# Altium PCB TURN PCB.PcbDoc (part 1 of 2)
Units mm, origin at the board's own origin, x right, y up, seen from the top; angles counter-clockwise.
Board outline 52.97 x 55 mm, 4 copper layers (Top Layer, Signal Layer 1, Signal Layer 2, Bottom Layer), stack 1.593 mm thick; 91 components, 69 nets, 300 pads, 173 vias.
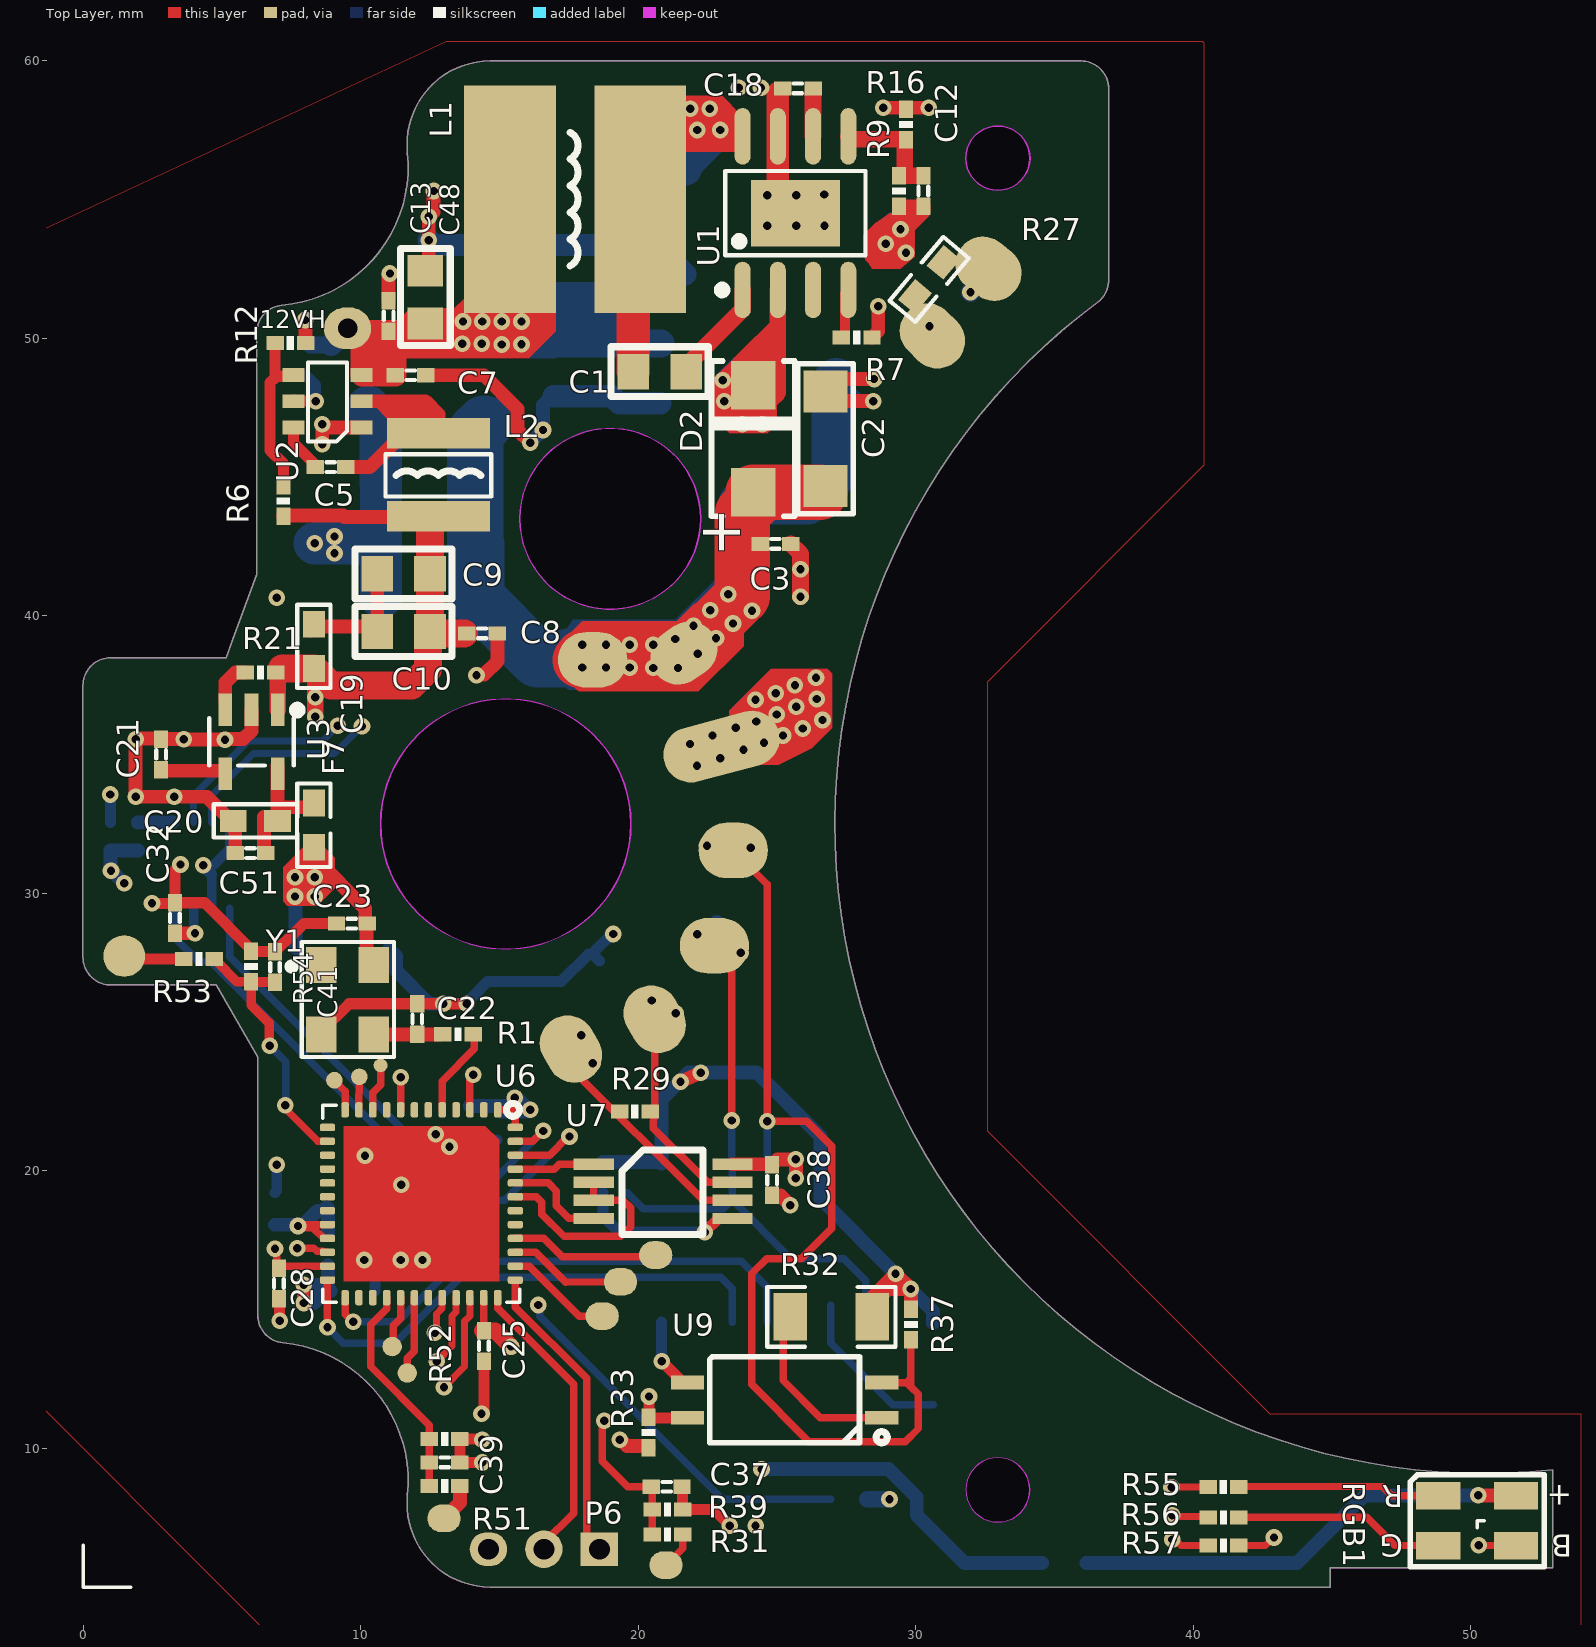
[diagram p0: Top Layer view]
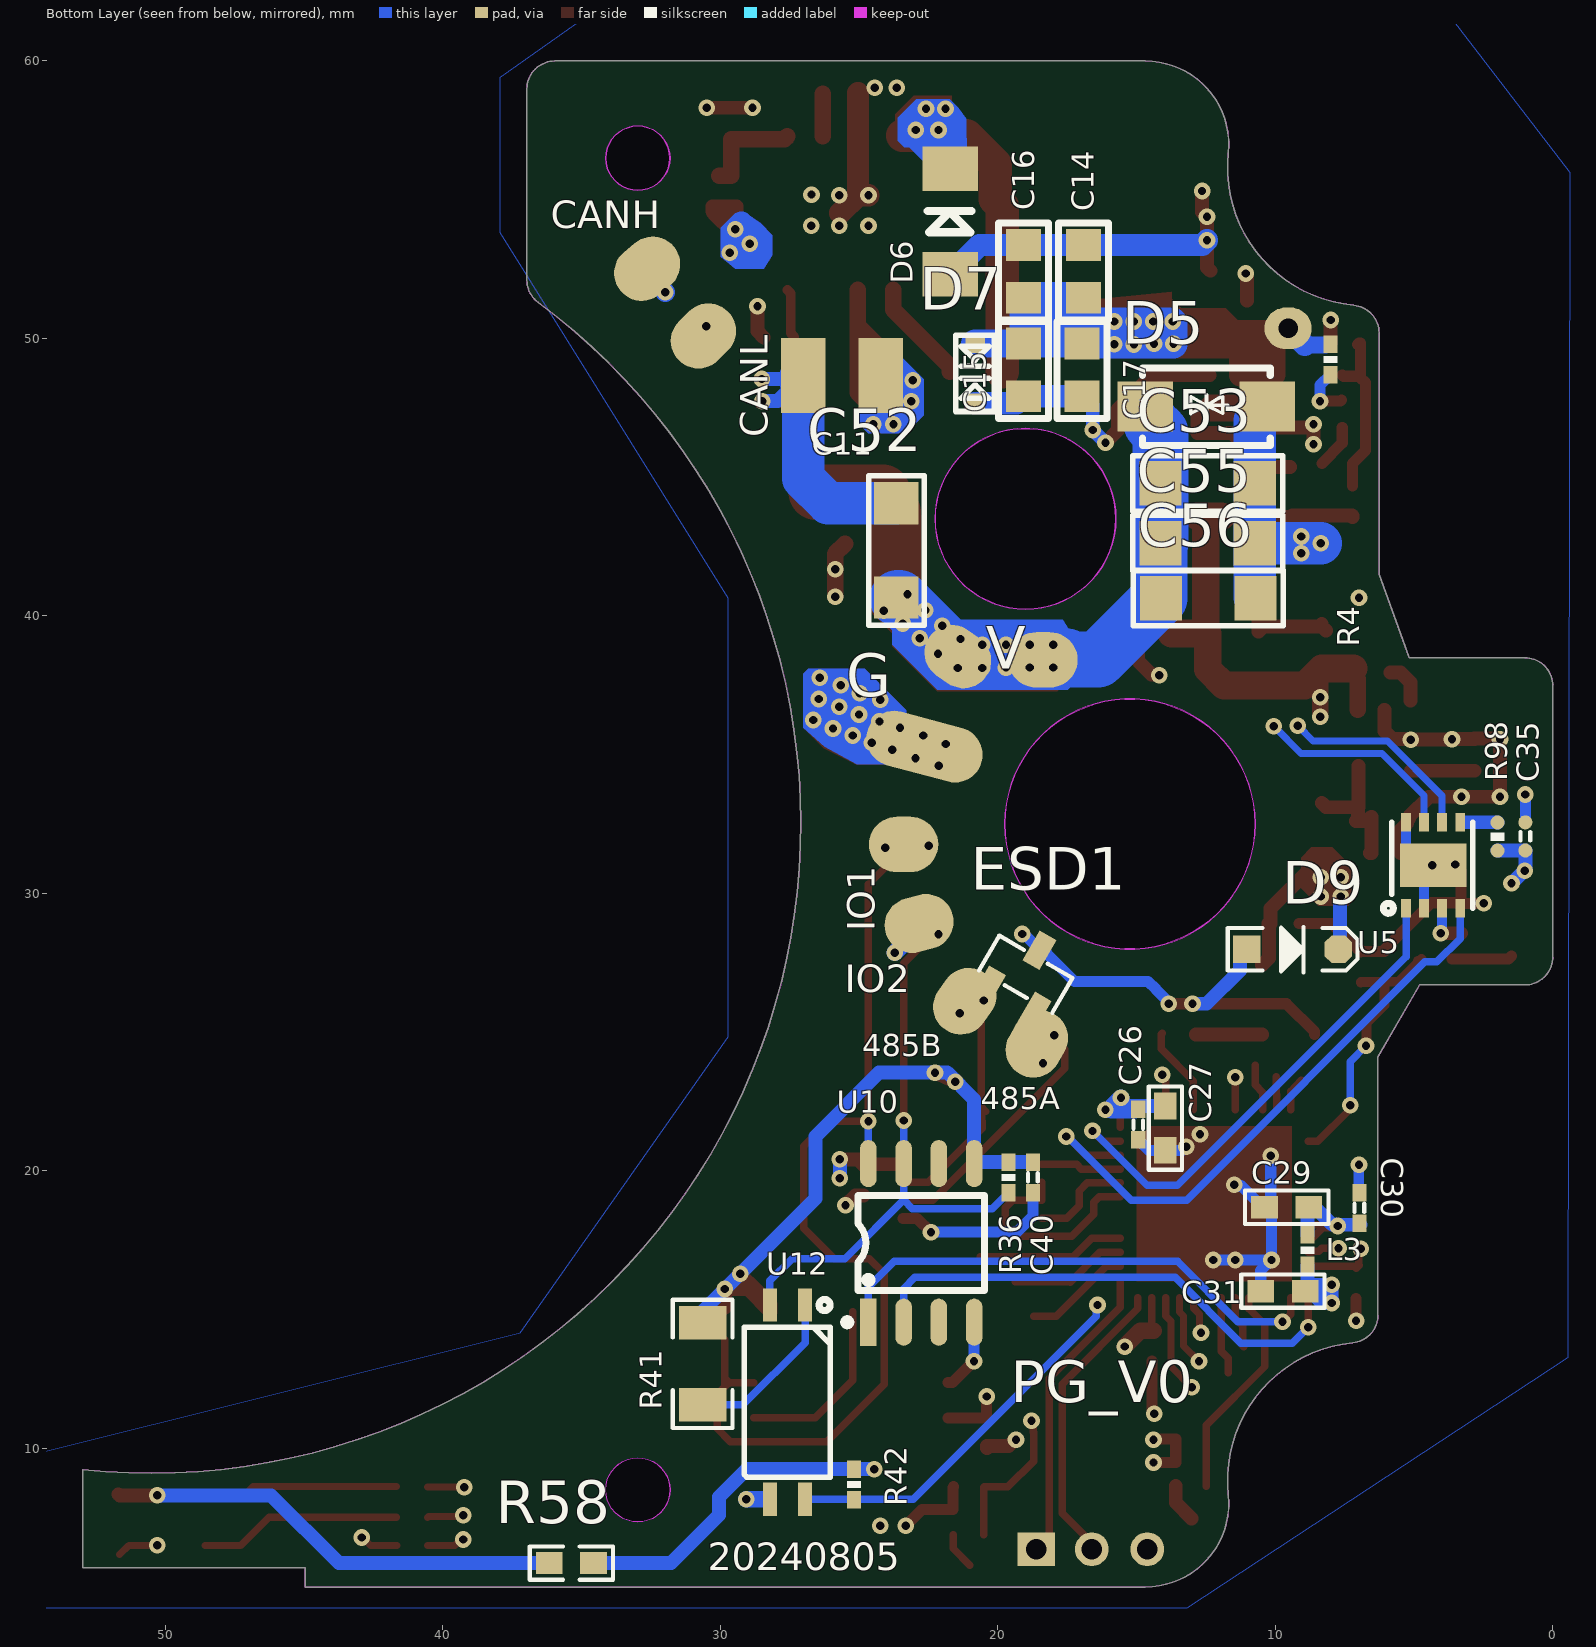
[diagram p1: Bottom Layer view, seen from below]
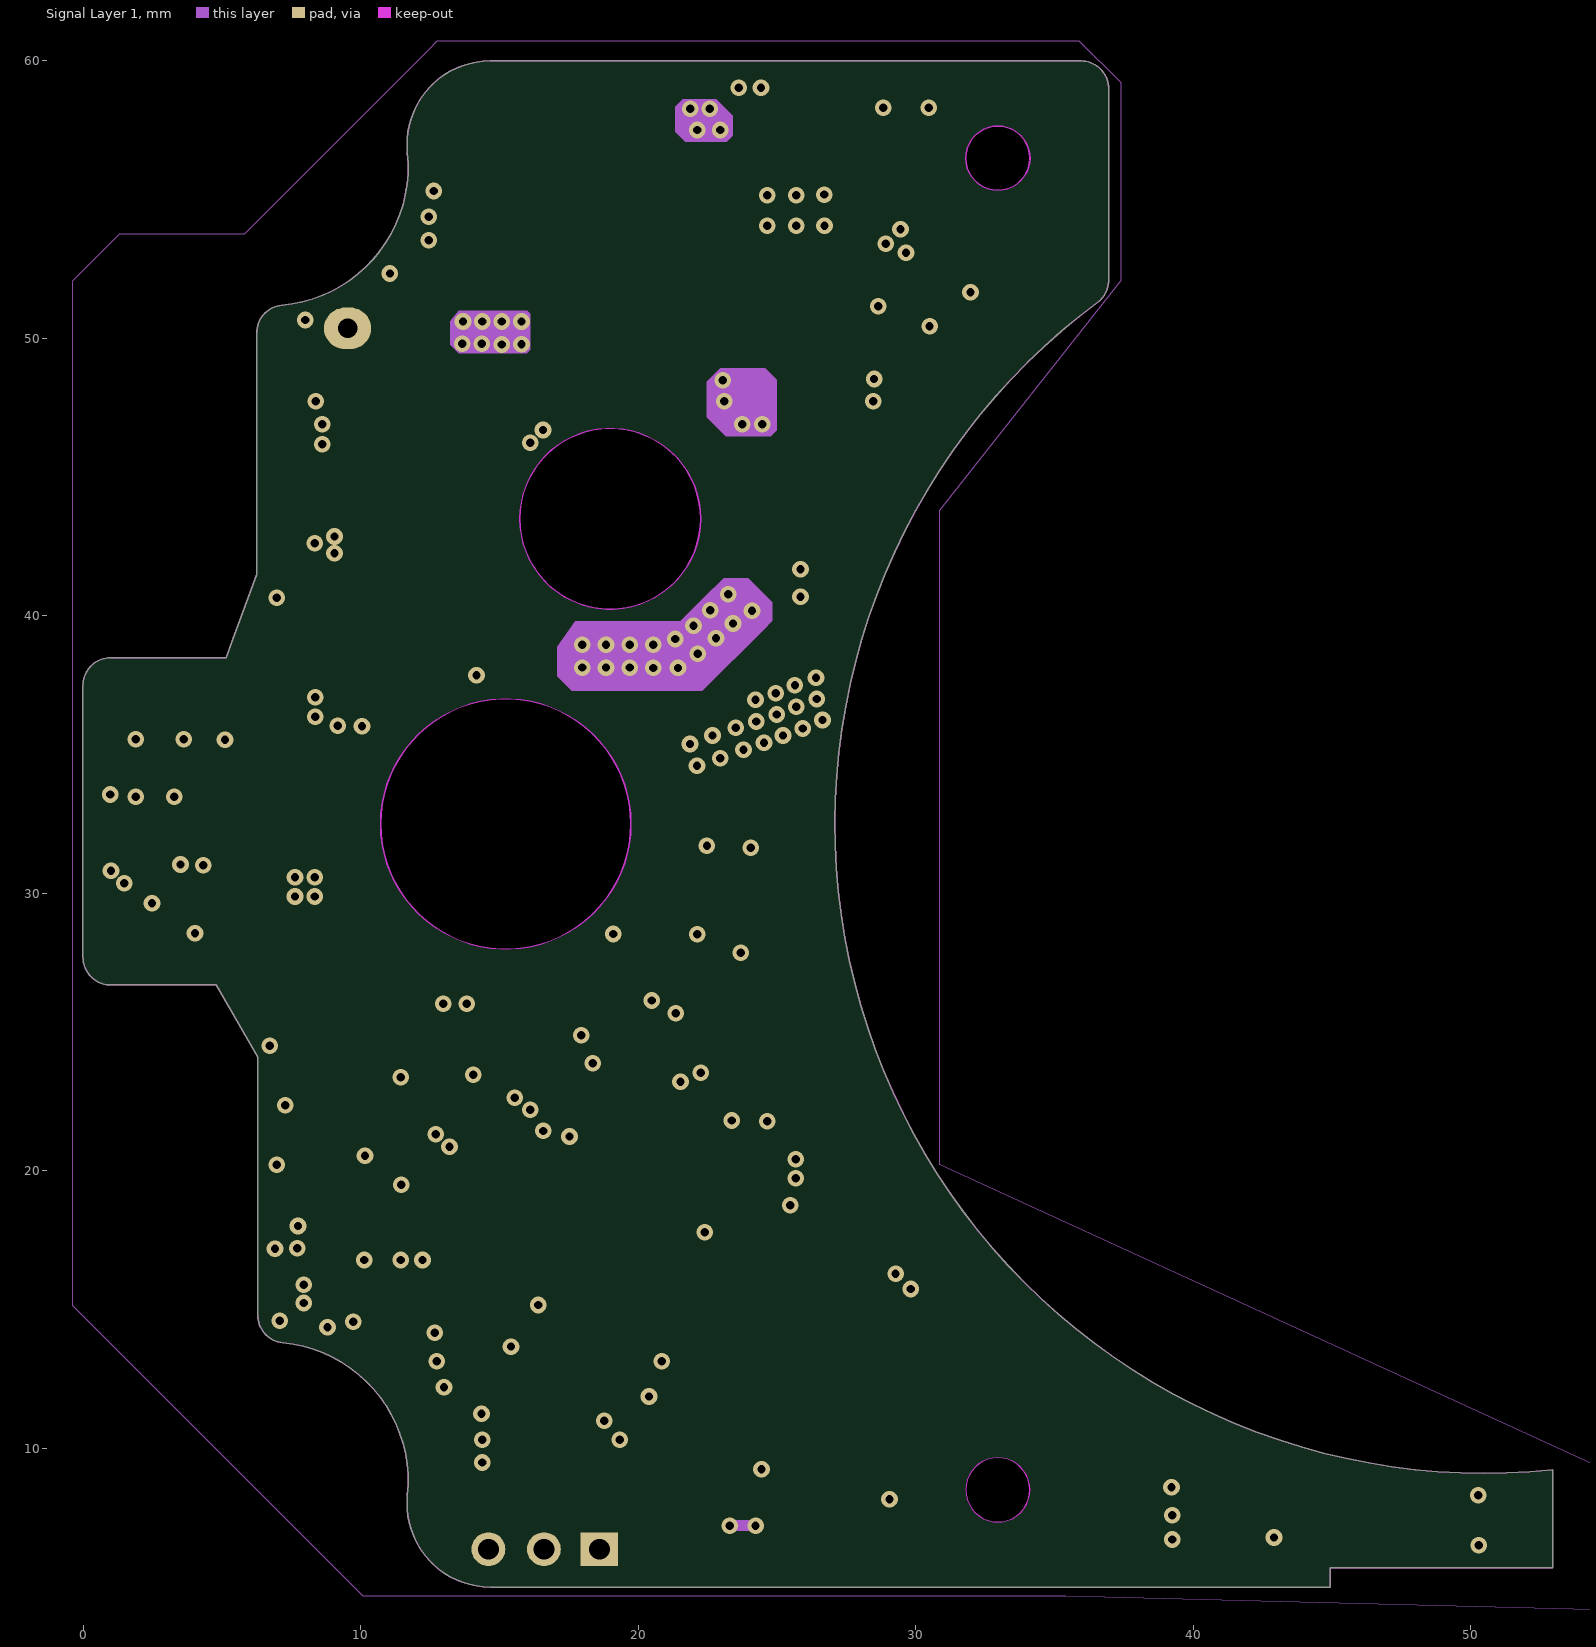
[diagram p2: Signal Layer 1]
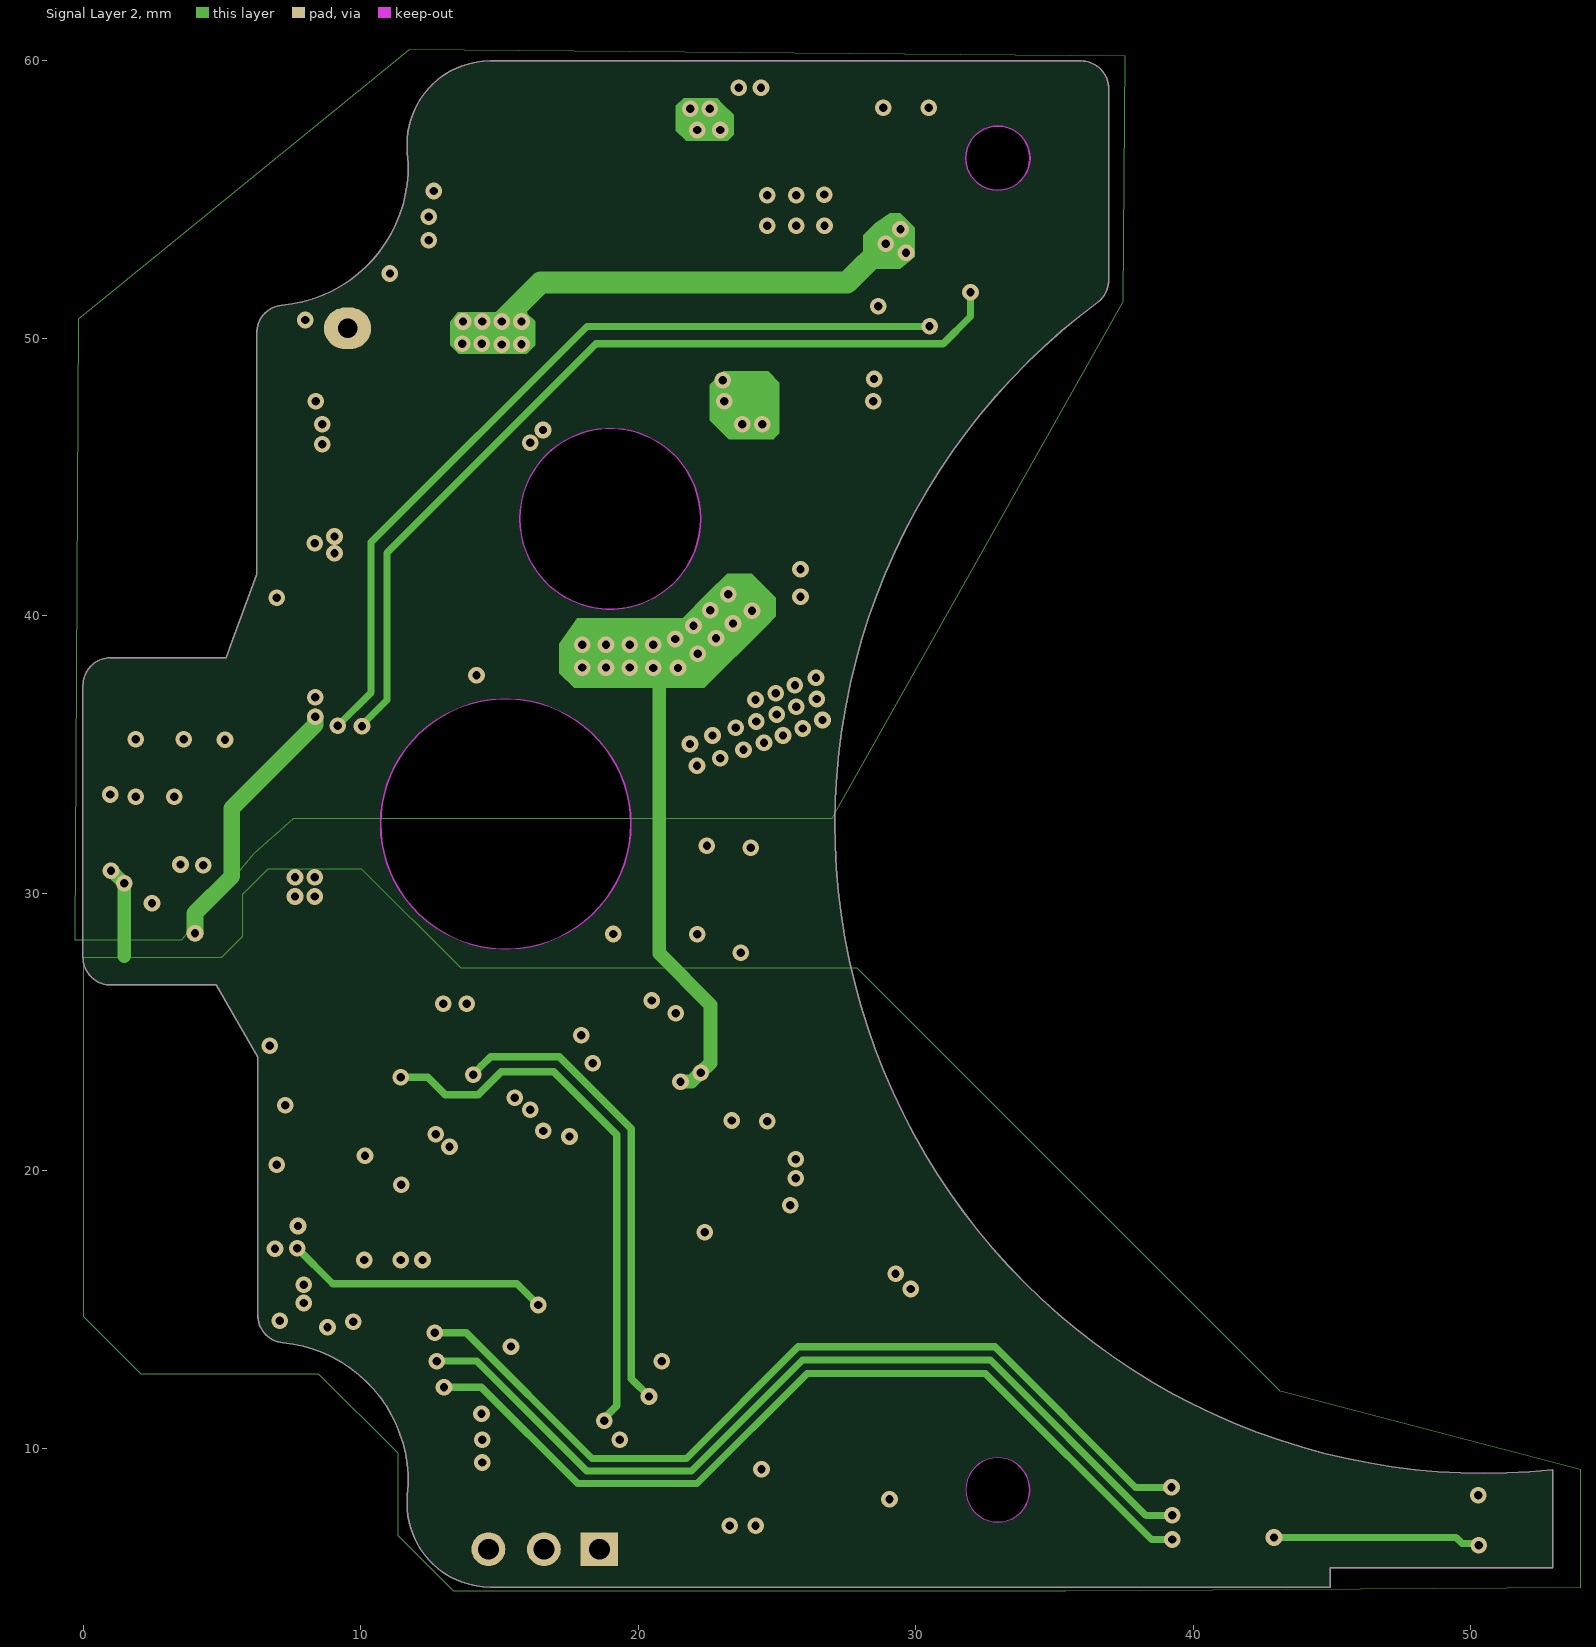
[diagram p3: Signal Layer 2]

## Layer stack, top to bottom
Top Solder: solder mask 0.0102, Solder Resist, Dk 3.5
Top Layer: signal copper 0.0356
Dielectric 1: core 0.45, FR-4, Dk 30
Signal Layer 1: signal copper 0.036
Dielectric 3: prepreg 0.55, Dk 50
Signal Layer 2: signal copper 0.036
Dielectric 2: core 0.45, Dk 30
Bottom Layer: signal copper 0.0356
Bottom Solder: solder mask 0.0102, Solder Resist, Dk 3.5

## Board outline
0.993,26.7 4.793,26.7 6.293,24.102 6.293,14.797 ccw(c7.293,14.797) 7.197,13.802 cw(c6.716,8.826) 11.688,8.309 ccw(c14.672,8) 14.672,5 44.954,5 44.954,5.7 52.964,5.7 52.964,9.231 cw(c50.494,32.5) 47.992,9.234 cw(c50.494,32.5) 36.559,51.299 ccw(c35.963,52.103) 36.963,52.103 36.963,59 ccw(c35.963,59) 35.963,60 14.672,60 ccw(c14.672,57) 11.688,56.691 cw(c6.714,56.175) 7.163,51.195 ccw(c7.252,50.199) 6.252,50.199 6.252,41.494 5.399,39.149 5.16,38.494 0.993,38.494 ccw(c0.993,37.494) -0.007,37.494 -0.007,27.7 ccw(c0.993,27.7)
cut-out: 10.717,32.5 cw(c15.23,32.5) 19.744,32.5 cw(c15.23,32.5)
cut-out: 32.97,55.343 cw(c32.97,56.5) 31.813,56.5 cw(c32.97,56.5) 32.97,57.657 cw(c32.97,56.5) 34.127,56.5 cw(c32.97,56.5)
cut-out: 31.813,8.5 ccw(c32.97,8.5) 32.97,7.343 ccw(c32.97,8.5) 34.127,8.5 ccw(c32.97,8.5) 32.97,9.657 ccw(c32.97,8.5)
cut-out: 19,40.243 cw(c19,43.5) 15.743,43.5 cw(c19,43.5) 19,46.757 cw(c19,43.5) 22.256,43.5 cw(c19,43.5)

## Design rules (kind name [scope] priority, off if disabled: settings)
Clearance POLY [INPOLY] p1: gap=0.3 ignorepadtopadclearanceinfootprint=FALSE
Clearance [All] p2: gap=0.2 ignorepadtopadclearanceinfootprint=FALSE except(0.3: Arc-Fill Arc-Poly Arc-Region Track-Fill Track-Poly Track-Region THPad-Fill THPad-Poly THPad-Region)
PolygonConnect [All] p1: connectstyle=Direct reliefconductorwidth=0.254 reliefentries=4 polygonreliefangle="90 Angle" airgapwidth=0.254
RoutingVias [All] p1: holewidth=0.711 width=0.6 viastyle="Through Hole" minholewidth=0.3 minwidth=0.6 maxholewidth=0.711 maxwidth=1.27
SilkToSilkClearance [All] p1 off: silktosilkclearance=0.254
SilkToSolderMaskClearance [IsPad] p1 off: minsilkscreentomaskgap=0.254 clearancetoexposedcopper=TRUE
SolderMaskExpansion [All] p1: expansion=0.102 istentingtop=FALSE
Width [All] p1: maxlimit=5 minlimit=0.254 preferedwidth=0.254
28 further rules are at their usual default settings.

## Components (designator, comment, footprint, x,y, rotation, side; value= is the part's Value field where it differs from the comment)
12VH "Test point" PAD07 9.516,50.406 r90 top
C1 "100nF ±10% 100V 0805" 0805C 21.73,48.801 r180 top value=100nF
C2 "10uF ±10% 50V" 1206C 26.756,44.683 r90 top value=100pF
C3 "100nF ±10% 50V" 0402C 24.952,42.598 r0 top value=100pF
C5 "100nF ±5% 50V 0402" 0402C 8.918,45.363 r0 top value=100pF
C7 "100nF ±10% 50V" 0402C 11.806,48.674 r0 top value=100pF
C8 "100nF ±10% 50V" 0402C 14.381,39.368 r0 top value=100pF
C9 "47uF/10V" 0805C 12.498,41.517 r180 top value=100pF
C10 "47uF/10V" 0805C 12.498,39.438 r180 top value=100pF
C11 "10uF(106) ±10% 50V" C1210 25.606,48.663 r0 bottom
C12 "330pF ±5% 50V 0402" 0402C 30.281,55.313 r90 top value=330pF
C13 "100nF ±10% 50V" 0402C 11.006,50.813 r90 top value=100pF
C14 "10uF ±10% 50V 0805" 0805C 16.909,51.468 r90 bottom value=100pF
C15 "22uF ±20% 25V 0805" 0805C 19.068,49.817 r270 bottom value=100pF
C16 "22uF ±20% 25V 0805" 0805C 19.068,51.468 r90 bottom value=100pF
C17 "22uF ±20% 25V 0805" 0805C 16.956,49.817 r270 bottom value=100pF
C18 "8.2nF ±10% 50V" 0402C 25.756,59.013 r180 top value=8.2nF
C19 "1uF ±10% 10V 0603" 0603C 8.318,38.103 r90 top value=100pF
C20 "1uF ±10% 10V 0603" 0603C 7.005,32.613 r180 top value=100pF
C21 "NC/22nF/25V" 0402C 2.806,35.007 r90 top value=100pF
C22 "15pF/6.3V" 0402C 12.041,25.471 r270 top
C23 "100nF ±10% 50V" 0402C 9.681,28.909 r0 top value=0.1uF/6.3V
C25 "100nF ±10% 50V" 0402C 14.441,13.688 r90 top value=0.1uF/10V
C26 "100nF ±10% 50V" 0402C 14.931,21.663 r90 bottom value=0.1uF/10V
C27 "10uF ±10% 10V 0603" 0603C 13.956,20.738 r90 bottom value=10uF/10V
C28 "100nF ±10% 50V" 0402C 7.056,15.938 r90 top value=0.1uF/10V
C29 "1uF ±10% 6.3V" 0603C 10.381,18.688 r180 bottom value="1uF ±10% 10V 0603"
C30 "100nF ±10% 50V" 0402C 6.961,18.663 r270 bottom value=0.1uF/10V
C31 "10uF ±10% 10V 0603" 0603C 10.518,15.663 r180 bottom value=10uF/10V
C32 "100nF ±10% 50V" 0402C 3.306,29.113 r90 top value=100pF
C35 "100nF(104) ±10% 50V 0402" C0402-S 0.981,32.56 r270 bottom
C37 "10nF/25V" 0402C 21.033,8.614 r180 top
C38 "100nF ±10% 50V" 0402C 24.831,19.663 r90 top value=0.1uF/10V
C39 "10nF/25V" 0402C 13.031,9.488 r180 top
C40 "100nF ±10% 50V" 0402C 18.731,19.763 r270 bottom value=100pF
C41 "10nF/25V" 0402C 6.914,27.341 r270 top
C48 "22uF ±20% 25V 0805" 0805C 12.331,50.538 r90 top value=100pF
C51 "100nF ±10% 50V" 0402C 6.03,31.454 r180 top value=100pF
C52 "10uF ±10% 50V" 1206C 23.652,40.659 r90 bottom value=100pF
C53 "10uF ±10% 50V" 1206C 14.13,44.774 r180 bottom value=100pF
C55 "10uF ±10% 50V" 1206C 14.13,42.622 r180 bottom value=100pF
C56 "10uF ±10% 50V" 1206C 14.109,40.64 r180 bottom value=100pF
D2 "SS54F" SMA 24.148,46.388 r90 top
D5 "SMAJ40CA" SMA_L4.4-W2.8-LS5.1-BI 12.471,47.6 r0 bottom
D6 "SS26FL" SS26FL 21.706,56.113 r270 bottom value=700mV
D7 "ESDBW18VD3" SOD-323A 20.813,49.817 r270 bottom
D9 "LBZT52C5V6T1G" SOD-123 9.37,27.986 r180 bottom
ESD1 "LBT23C24L02" SOT-23-3_L2.9-W1.3-P1.90-LS2.4-BR 18.985,27.086 r300 bottom
F7 "FC0603-1150FS" 0603R 8.316,33.256 r270 top
L1 "SRN8040TA-150M" VLP8040 20.084,55.024 r180 top value=15uH
L2 "3.3uH ±20% 2.4A" L4030 12.806,46.588 r270 top value=3.3uH
L3 "600 Ohms@100MHz" 0402R 8.831,17.138 r90 bottom
P6 "A2001WV-3P" PH2.0_1X3S 18.606,6.363 r180 top
R1 "0R 1%" 0402R 13.507,24.924 r180 top
R4 "100kΩ ±1% 0402" 0402R 8.006,49.238 r270 bottom value="10K 5%"
R6 "100kΩ ±1% 0402" 0402R 7.213,44.137 r270 top value="10K 5%"
R7 "20kΩ ±1% 0402" 0402R 27.881,50.038 r0 top value=20k
R9 "150kΩ ±1% 0402" 0402R 29.4,55.313 r90 top value=150k
R12 "13.7K 1%" 0402R 7.466,49.838 r180 top value="31.6K 1%"
R16 "10kΩ ±1% 0402" 0402R 29.656,57.713 r90 top value=10k
R21 "100kΩ ±1% 0402" 0402R 6.391,37.964 r180 top value="10K 5%"
R27 "120R 1% 0603" 0603R 29.977,51.513 r50 top value=1K
R29 "120Ω ±1% 0402" 0402R 19.881,22.138 r0 top value=1K
R31 "51K 1‰" 0402R 21.056,6.891 r180 top
R32 "6.2k 5% 1206" R1206 26.968,14.738 r0 top value=1K
R33 "4k7 1%" 0402R 20.381,10.563 r270 top value=1K
R36 "10kΩ ±1% 0402" 0402R 19.612,19.763 r270 bottom value="30K 5%"
R37 "10kΩ ±1% 0402" 0402R 29.831,14.463 r270 top value="30K 5%"
R39 "10K 1‰" 0402R 21.056,7.788 r0 top
R41 "6.2k 5% 1206" R1206 30.631,13.042 r90 bottom value=1K
R42 "4k7 1%" 0402R 25.177,8.7 r90 bottom value=1K
R51 "51K 1‰" 0402R 13.031,8.638 r180 top
R52 "10K 1‰" 0402R 13.031,10.338 r0 top
R53 "51K 1‰" 0402R 4.173,27.638 r0 top
R54 "10K 1‰" 0402R 6.056,27.363 r90 top
R55 "1k5 5%" 0402R 41.092,8.608 r180 top value=1K
R56 "1k5 5%" 0402R 41.096,7.506 r180 top value=1K
R57 "1k5 5%" 0402R 41.102,6.5 r180 top value=1K
R58 "0R 5%" 0603R 36.162,5.863 r180 bottom value=1K
R98 "0Ω" R0402-S 1.983,32.554 r270 bottom
RGB1 "S4-3528RGBTA-A" LED_3528 50.24,7.389 r180 top
U1 "LMR14020SDDAR" LM4020 25.672,54.516 r0 top value=N/A
U2 "LMR51420YDDC" TSOT23-6 10.031,46.788 r90 top
U3 "ME6215C33M5G" SOT-23-5_L3.0-W1.7-P0.95-LS2.8-BL 6.067,35.463 r180 top
U5 "TPT1256-DF6R" DFN8 5.281,29.463 r90 bottom
U6 "STM32G431CBU6" UFQFPN48 12.191,18.813 r180 top
U7 "SIT3485EUA" VSSOP8 18.401,20.238 r0 top
U9 "PS2801-1" SSOP4 28.781,11.098 r90 top
U10 "ULN2001D" SOIC8 24.657,14.543 r180 bottom
U12 "PS2801-1" SSOP4 26.936,15.163 r0 bottom
Y1 "8M 3.3V" XTAL_3225 8.577,27.413 r270 top

## Footprints (in the part's own frame and the unit in brackets; to place one, negate y for a bottom-side part, rotate by r counter-clockwise, add the part's x,y. Pads: shape width x height; smd on the part's side, far side on the other; paste and mask are expansions set on the pad)
0402C [mm]
  rect 0.63x0.508 smd: 1(-0.55,0) 2(0.55,0)
  silkscreen extent -0.15,-0.18 0.15,0.18, body extent -0.78,-0.25 0.73,0.26, height 0.25
0402R [mm]
  rect 0.63x0.508 smd: 1(-0.55,0) 2(0.55,0)
  silkscreen extent -0.13,-0.25 0.13,0.25, body extent -0.78,-0.25 0.73,0.26, height 0.25
0603C [mm]
  rect 0.96x0.8 smd: 1(0,0) 2(1.6,0)
  silkscreen extent -0.7,-0.6 2.3,0.6, body extent -0.25,-0.38 1.78,0.38, height 1
0603R [mm]
  rect 0.96x0.8 smd: 1(0,0) 2(1.6,0)
  silkscreen extent -0.7,-0.6 2.3,0.6, body extent 0,-0.41 1.6,0.41, height 0.45
0805C [mm]
  rect 1.14x1.27 smd: 1(0,0) 2(1.9,0)
  silkscreen extent -0.8,-0.9 2.7,0.9, body extent -0.25,-0.64 2.16,0.64, height 1.2
1206C [mm]
  rect 1.52x1.6 smd: 1(0,0) 2(3.4,0)
  silkscreen extent -1,-1 4.4,1, body extent 0,-0.83 3.81,0.83, height 1.2
C0402-S [mil]
  round 20 smd: 1(0,0) 2(40,0)
  silkscreen extent 14,-7 26,7, body extent 0,-10 40,10, height 5
C1210 [mm]
  rect 1.6x2.7 smd: 1(-1.4,0) 2(1.4,0)
  body extent -1.8,-1.23 1.4,1.27, height 2
DFN8 [mm]
  rect 0.65x0.35 smd: 1(0,0) 2(0,-0.65) 3(0,-1.3) 4(0,-1.95) 5(3.1,-1.95) 6(3.1,-1.3) 7(3.1,-0.65) 8(3.1,0)
  rect 1.55x2.4 smd: 9(1.55,-0.975)
  silkscreen extent -0.18,-2.41 3.1,0.81, body extent 0,-2.45 3.15,0.55, height 0.8
L4030 [mm]
  rect 1.1x3.7 smd: 1(0,0) 2(3,0)
  silkscreen extent 0.76,-1.91 2.29,1.91, body extent 0,-1.91 3,1.91, height 3
LED_3528 [mm]
  rect 1.6x1 smd: 1(1.4,-0.9) 2(-1.4,-0.9) 3(1.4,0.9) 4(-1.4,0.9)
  silkscreen extent -2.41,-1.65 2.41,1.65, body extent -1.75,-1.19 1.75,1.19, height 1.9
LM4020 [mm]
  oval 0.574x2.038 smd: 1(-1.905,-2.769) 2(-0.635,-2.769) 3(0.635,-2.769) 4(1.905,-2.769) 5(1.905,2.769) 6(0.635,2.769) 7(-0.635,2.769) 8(-1.905,2.769)
  rect 3.2x2.4 smd: 9(0,0)
  silkscreen extent -2.79,-2.92 2.53,1.52, body extent -2.58,-1.65 2.63,1.63, height 1.5
PAD07 [mm]
  oval 1.5x1.7 hole 0.7: 1(-0.043,-0.014)
PH2.0_1X3S [mm]
  rect 1.35x1.219 hole 0.75: 1(0,0)
  round 1.35 / inner round 1.219 / far side round 1.219 hole 0.75: 2(2,0)
  oval 1.35x1.219 / inner round 1.219 / far side round 1.219 hole 0.75: 3(4,0)
R0402-S [mil]
  round 20 smd: 1(0,0) 2(40,0)
  silkscreen extent 14,-10 26,10, body extent 0,-10 40,10, height 5
R1206 [mm]
  rect 1.208x1.701 smd: 1(-1.479,0) 2(1.479,0)
  silkscreen extent -2.31,-1.08 2.31,1.08, body extent -1.53,-0.85 1.6,0.85, height 0.9
SMA [mm]
  rect 1.75x1.6 smd: 1(-1.925,0) 2(1.925,0)
  silkscreen extent -2.8,-1.5 2.8,1.5, body extent -2.6,-1.32 2.6,1.33, height 2.15
SMA_L4.4-W2.8-LS5.1-BI [mm]
  rect 2x1.8 smd: 1(-2.198,0.06) 2(2.202,0.06)
  silkscreen extent -2.3,-1.34 2.3,1.46
SOD-123 [mm] "2.7x1.6X1.1mm（长宽高，不包括引脚）"
  oct 1x1 smd: 1(1.65,0)
  rect 1x1 smd: 2(-1.65,0)
  silkscreen extent -2.34,-0.84 2.34,0.81, body extent -1.85,-0.8 1.85,0.8, height 1.22
SOD-323A [mm]
  rect 0.7x0.7 smd: 1(0,0) 2(2.15,0)
  silkscreen extent -0.3,-0.7 2.45,0.7
SOIC8 [mm]
  rect 0.6x1.7 smd: 1(0,0)
  oval 0.6x1.7 smd: 2(1.27,0) 3(2.54,0) 4(3.81,0) 5(3.81,5.715) 6(2.54,5.715) 7(1.27,5.715) 8(0,5.715)
  silkscreen extent -0.89,-0.13 4.19,4.57, body extent -0.51,1.02 4.32,4.7, height 1.5
SOT-23-3_L2.9-W1.3-P1.90-LS2.4-BR [mm]
  rect 1.25x0.7 smd: 1(1,-0.95) 2(1,0.95) 3(-1,0)
  silkscreen extent -0.73,-1.53 0.73,1.53
SOT-23-5_L3.0-W1.7-P0.95-LS2.8-BL [mm]
  rect 0.49x1.157 smd: 1(-0.95,-1.154) 2(0,-1.154) 3(0.95,-1.154)
  rect 0.49x1.175 smd: 4(0.95,1.154) 5(-0.95,1.154)
  silkscreen extent -1.8,-1.29 1.53,0.85, body extent -1.53,-0.9 1.55,0.9, height 1.3
SS26FL [mm]
  rect 1.6x2 smd: 1(0,0) 2(3.8,0)
  silkscreen extent 1.52,-0.82 2.29,0.76
SSOP4 [mm]
  rect 0.5x1.2 smd: 1(0,0) 2(1.27,0) 3(1.27,7) 4(0,7)
  silkscreen extent -0.9,-0.2 2.2,6.2, body extent -0.89,0.76 2.16,6.22, height 2.1
TSOT23-6 [mm]
  rect 0.5x0.8 smd: 1(0,0) 2(0.95,0) 3(1.9,0) 4(1.9,2.45) 5(0.95,2.45) 6(0,2.45)
  silkscreen extent -0.5,0.53 2.35,1.92, body extent -0.51,0.38 2.41,2.03, height 1
UFQFPN48 [mm]
  rrect52% 0.27x0.55 smd mask+0.05: 1(-2.75,-3.385) 2(-2.25,-3.385) 3(-1.75,-3.385) 4(-1.25,-3.385) 5(-0.75,-3.385) 6(-0.25,-3.385) 7(0.25,-3.385) 8(0.75,-3.385) 9(1.25,-3.385) 10(1.75,-3.385) 11(2.25,-3.385) 12(2.75,-3.385) 25(2.75,3.385) 26(2.25,3.385) 27(1.75,3.385) 28(1.25,3.385) 29(0.75,3.385) 30(0.25,3.385) 31(-0.25,3.385) 32(-0.75,3.385) 33(-1.25,3.385) 34(-1.75,3.385) 35(-2.25,3.385) 36(-2.75,3.385)
  rrect52% 0.55x0.27 smd mask+0.05: 13(3.385,-2.75) 14(3.385,-2.25) 15(3.385,-1.75) 16(3.385,-1.25) 17(3.385,-0.75) 18(3.385,-0.25) 19(3.385,0.25) 20(3.385,0.75) 21(3.385,1.25) 22(3.385,1.75) 23(3.385,2.25) 24(3.385,2.75) 37(-3.385,2.75) 38(-3.385,2.25) 39(-3.385,1.75) 40(-3.385,1.25) 41(-3.385,0.75) 42(-3.385,0.25) 43(-3.385,-0.25) 44(-3.385,-0.75) 45(-3.385,-1.25) 46(-3.385,-1.75) 47(-3.385,-2.25) 48(-3.385,-2.75)
  oct 0.025x0.025 smd mask+0.05: 49(0,0)
  Top Layer region: -2.8,2.8 -2.8,-2.3 -2.3,-2.8 2.8,-2.8 2.8,2.8 -2.8,2.8
  silkscreen extent -3.55,-3.62 3.55,3.55, body extent -3.51,-3.51 3.51,3.51, height 0.78
VLP8040 [mm]
  rect 3.3x8.2 smd: 1(0,0) 2(4.7,0)
  silkscreen extent 2.24,-2.41 2.54,2.41, body extent -0.92,-4.09 5.51,4.11, height 4
VSSOP8 [mm]
  rect 1.45x0.4 smd: 1(0,0) 2(0,-0.65) 3(0,-1.3) 4(0,-1.95) 5(5,-1.95) 6(5,-1.3) 7(5,-0.65) 8(5,0)
  silkscreen extent 1.02,-2.54 3.94,0.51, body extent 0.92,-2.47 4.03,0.55, height 0.9
XTAL_3225 [mm]
  rect 1.3x1.1 smd: 1(0,0) 2(2.5,0) 3(2.5,1.9) 4(0,1.9)
  silkscreen extent -0.83,-1.19 3.31,2.63, body extent -0.36,-0.29 2.84,2.21, height 0.72

## Part data
12VH: library part TP, "测试点"
C1: library part C2012X7R2A104K125AA, "C2012X7R2A104K12AA/100nF ±10% 100V 0805", Manufacturer Name=TDK, Manufacturer Part Number=C2012X7R2A104K125AA, PackageReference=C2012X7R2A104K125AA
C2 C52 C53 C55 C56: library part "Cap Pol1", "GRM31CB31H106KA12L/10uF ±10% 50V 1206/（可选±20%替换）", LatestRevisionDate=17-Jul-2002, LatestRevisionNote="Re-released for DXP Platform.", PackageDescription="Polarized Capacitor (Radial); 2 Leads", PackageReference=RB7.6-15, Published=8-Jun-2000, Publisher="Altium Limited"
C3 C7 C8 C13 C23 C25 C26 C28 C30 C32 C38 C40 C51: library part Cap, "C0402X7R104K500NT/100nF ±10% 50V 0402", LatestRevisionDate=17-Jul-2002, LatestRevisionNote="Re-released for DXP Platform.", PackageReference=RAD-0.3, Published=8-Jun-2000, Publisher="Altium Limited"
  C3 C7 C8 C13 C25 C26 C28 C30 C32 C38 C40 C51: PackageDescription="Radial Cap, Thru-Hole; 2 Leads; 0.3 in Pin Spacing"
C5: library part Cap, "CC0402JRX7R8BB103//10nF ±5% 25V 0402", LatestRevisionDate=17-Jul-2002, LatestRevisionNote="Re-released for DXP Platform.", PackageDescription="Radial Cap, Thru-Hole; 2 Leads; 0.3 in Pin Spacing", PackageReference=RAD-0.3, Published=8-Jun-2000, Publisher="Altium Limited"
C9 C10 C21 C22 C37 C39 C41: library part Cap, "Capacitor", LatestRevisionDate=17-Jul-2002, LatestRevisionNote="Re-released for DXP Platform.", PackageReference=RAD-0.3, Published=8-Jun-2000, Publisher="Altium Limited"
  C9 C10 C21 C37 C39 C41: PackageDescription="Radial Cap, Thru-Hole; 2 Leads; 0.3 in Pin Spacing"
C11: library part GRM32ER71J106KA12L, "UMK325BJ106KM-P//10uF(106) ±10% 50V C1210", Manufacturer Name=MuRata, Manufacturer Part Number=GRM32ER71J106KA12L, PackageReference=GRM32ER71J106KA12L
C12: library part GRM033R71E331KA01D, "C1005NP0331JGT//330pF ±5% 50V 0402", Manufacturer Name=MuRata, Manufacturer Part Number=GRM033R71E331KA01D, PackageReference=GRM033R71E331KA01D
C14: library part Cap, "GRM21BR61H106KE43L", LatestRevisionDate=17-Jul-2002, LatestRevisionNote="Re-released for DXP Platform.", PackageDescription="Radial Cap, Thru-Hole; 2 Leads; 0.3 in Pin Spacing", PackageReference=RAD-0.3, Published=8-Jun-2000, Publisher="Altium Limited"
C15 C16 C17 C48: library part Cap, "CL21A226MAYNNNE", LatestRevisionDate=17-Jul-2002, LatestRevisionNote="Re-released for DXP Platform.", PackageDescription="Radial Cap, Thru-Hole; 2 Leads; 0.3 in Pin Spacing", PackageReference=RAD-0.3, Published=8-Jun-2000, Publisher="Altium Limited"
C18: library part GRM155R71C822KA01D, "0402B822K500CT//8.2nF ±10% 50V 0402//", Manufacturer Name=MuRata, Manufacturer Part Number=GRM155R71C822KA01D, PackageReference=GRM155R71C822KA01D
C19 C20: library part Cap, "CC0603KRX7R6BB105", LatestRevisionDate=17-Jul-2002, LatestRevisionNote="Re-released for DXP Platform.", PackageDescription="Radial Cap, Thru-Hole; 2 Leads; 0.3 in Pin Spacing", PackageReference=RAD-0.3, Published=8-Jun-2000, Publisher="Altium Limited"
C27: library part Cap, "0603B103K100CT", LatestRevisionDate=17-Jul-2002, LatestRevisionNote="Re-released for DXP Platform.", PackageDescription="Radial Cap, Thru-Hole; 2 Leads; 0.3 in Pin Spacing", PackageReference=RAD-0.3, Published=8-Jun-2000, Publisher="Altium Limited"
C29: library part Cap, "CC0402KRX7R5BB105", LatestRevisionDate=17-Jul-2002, LatestRevisionNote="Re-released for DXP Platform.", PackageDescription="Radial Cap, Thru-Hole; 2 Leads; 0.3 in Pin Spacing", PackageReference=RAD-0.3, Published=8-Jun-2000, Publisher="Altium Limited"
C31: library part Cap, "0603B103K100CT//10uF ±10% 10V 0603", LatestRevisionDate=17-Jul-2002, LatestRevisionNote="Re-released for DXP Platform.", PackageDescription="Radial Cap, Thru-Hole; 2 Leads; 0.3 in Pin Spacing", PackageReference=RAD-0.3, Published=8-Jun-2000, Publisher="Altium Limited"
C35: library part Cap, "GRM155R71H104KE14D", LatestRevisionDate=17-Jul-2002, LatestRevisionNote="Re-released for DXP Platform.", PackageDescription="Radial Cap, Thru-Hole; 2 Leads; 0.3 in Pin Spacing", PackageReference=RAD-0.3, Published=8-Jun-2000, Publisher="Altium Limited"
D2: library part "Diode 1N4148", "5A 40V  SMA", Code_JEDEC=DO-204-AH, ComponentLink1Description="Manufacturer Link", ComponentLink1URL=http://www.fairchildsemi.com/, ComponentLink2Description=Datasheet, ComponentLink2URL=http://www.fairchildsemi.com/ds/1N%2F1N4148.pdf, DatasheetVersion=1997, LatestRevisionDate=17-Jul-2002, LatestRevisionNote="Re-released for DXP Platform.", PackageDescription="Diode, Axial; Body 3.8 x 1.9 mm (LxDia. max), Lead Dia. 0.53 mm (max)", PackageReference=DO-35, Published=8-Jun-2000, Publisher="Altium Limited"
D5: library part DIODE-3, "双向TVS二极管"
D6: "SS26FL  SMAF", Manufacturer Name="Fairchild Semiconductor", Manufacturer Part Number=SS26FL, PackageReference=SS26FL
D7: library part PESD12VL1BA,115, Breakdown Voltage=14.2V, JLCPCB Part Class="Extended Part", LCSC Part Name=双向ESD, Manufacturer=Nexperia(安世), Maximum Clamping Voltage=37V, Operating Temperature=-65℃~+150℃@(Ta), Peak Pulse Current (Ipp)@10/1000us=5A, Peak Pulse Power Dissipation (Ppp)@10/1000us=200W, Reverse Stand-Off Voltage (Vrwm)=12V, Add into BOM=yes, Convert to PCB=yes, Datasheet=https://atta.szlcsc.com/upload/public/pdf/source/20170606/1496716521338.pdf, Device=PESD12VL1BA,115, Manufacturer Part=PESD12VL1BA,115, Number of Lines=单路, polarity=双向, Supplier=LCSC, Supplier Footprint=SOD-323, Supplier Part=C38558, Symbol=PESD12VL1BA,115, Type=ESD
D9: "稳压二极管反向使用", JLCPCB Part Class="Extended Part", LCSC Part Name="齐纳二极管 5.6V 500mW", Manufacturer=LRC(乐山无线电), Power Dissipation=500mW, Reverse Leakage Current (Ir)=5mA, Tolerance=-, Zener Voltage (Nom)=5.6V, Zener Voltage (Range)=5.2V~6V, Add into BOM=yes, Convert to PCB=yes, Datasheet=https://atta.szlcsc.com/upload/public/pdf/source/20180228/C12770_15198052845211377127.pdf, Device=LBZT52C5V6T1G, Diode Configuration=独立式, Manufacturer Part=LBZT52C5V6T1G, Name=LBZT52C5V6T1G, Supplier=LCSC, Supplier Footprint=SOD-123, Supplier Part=C12770, Symbol=LBZT52C5V6T1G, Zener Impedance (Zzt)=40Ω
ESD1: JLCPCB Part Class="Extended Part", Manufacturer=Brightking(君耀电子), Add into BOM=yes, Convert to PCB=yes, Datasheet=https://atta.szlcsc.com/upload/public/pdf/source/20200427/C523042_E04B1CCD74798A854320766B44FCE598.pdf, Device=LBT23C24L02, LCSC Part Name=LBT23C24L02, Manufacturer Part=LBT23C24L02, Name=LBT23C24L02, Supplier=LCSC, Supplier Footprint=SOT-23-3, Supplier Part=C523042, Symbol=LBT23C24L02
F7: library part "Fuse 2", "Fuse 1.5A", LatestRevisionDate=17-Jul-2002, LatestRevisionNote="Re-released for DXP Platform.", PackageReference=PIN-W2/E2.8, Published=8-Jun-2000, Publisher="Altium Limited"
L1: library part SRU8043-100Y, "SRN8040TA-150M  15uH  3.6A  50mΩ", Manufacturer Name=Bourns, Manufacturer Part Number=SRU8043-100Y, PackageReference=SRU8043-100Y
L2: library part Inductor, "SWPA4030S3R3MT", Code_IEC=1005, Code_JEITA=0402, LatestRevisionDate=29-May-2009, LatestRevisionNote="IPC-7351 Footprint Added.", PackageDescription="Chip Inductor", PackageReference=0402-A, Published=8-Jun-2000, Publisher="Altium Limited"
L3: library part IND_FB, "FERRITE BEAD 600 OHM 0402 1LN", Manufacturer="Murata Electronics North America", Manufacturer PN=BLM15BX601SN1D, Package Size="0402 (1005 Metric)", CLASS=DISCRETE, PART_NUMBER=TMP-492
P6: library part "Header 3", "Header, 3-Pin", LatestRevisionDate=17-Jul-2002, LatestRevisionNote="Re-released for DXP Platform.", Publisher="Altium Limited"
R1 R21 R31 R32 R33 R39 R41 R42 R51 R52 R53 R54 R55 R56 R57 R98: library part Res2, "Resistor", LatestRevisionDate=17-Jul-2002, LatestRevisionNote="Re-released for DXP Platform.", Published=8-Jun-2000, Publisher="Altium Limited"
  R32 R33 R41 R42 R55 R56 R57: PackageDescription="Axial Device, Thru-Hole; 2 Leads; 0.4 in Pin Spacing", PackageReference=AXIAL-0.4
  R98: PackageReference=AXIAL-0.4
R4: library part Res2, "0402WGF3902TCE", LatestRevisionDate=17-Jul-2002, LatestRevisionNote="Re-released for DXP Platform.", Published=8-Jun-2000, Publisher="Altium Limited"
R6: library part Res2, "RTT021003FTH", LatestRevisionDate=17-Jul-2002, LatestRevisionNote="Re-released for DXP Platform.", Published=8-Jun-2000, Publisher="Altium Limited"
R7: library part CRCW040226K1FKED, "AC0402FR-0720KL//20kΩ ±1% 0402", Manufacturer Name=Vishay-Dale, Manufacturer Part Number=CRCW040226K1FKED, PackageReference=CRCW040226K1FKED
R9: library part CRCW0402150KFKED, "CRCW0402150KFKED", Manufacturer Name=Vishay-Dale, Manufacturer Part Number=CRCW0402150KFKED, PackageReference=CRCW0402150KFKED
R12: library part Res2, "0402WGF1872TCE", LatestRevisionDate=17-Jul-2002, LatestRevisionNote="Re-released for DXP Platform.", Published=8-Jun-2000, Publisher="Altium Limited"
R16: library part RC0201FR-0710KL, "RC0201FR-0710KL", Manufacturer Name=Yageo, Manufacturer Part Number=RC0201FR-0710KL, PackageReference=RC0201FR-0710KL
R27: library part Res2, "RTT031200FTP//RC0603FR-07120RL", LatestRevisionDate=17-Jul-2002, LatestRevisionNote="Re-released for DXP Platform.", PackageDescription="Axial Device, Thru-Hole; 2 Leads; 0.4 in Pin Spacing", PackageReference=AXIAL-0.4, Published=8-Jun-2000, Publisher="Altium Limited"
R29: library part Res2, "RC0402FR-07120RL", LatestRevisionDate=17-Jul-2002, LatestRevisionNote="Re-released for DXP Platform.", PackageDescription="Axial Device, Thru-Hole; 2 Leads; 0.4 in Pin Spacing", PackageReference=AXIAL-0.4, Published=8-Jun-2000, Publisher="Altium Limited"
R36 R37: library part Res2, "RC0201FR-0710KL", LatestRevisionDate=17-Jul-2002, LatestRevisionNote="Re-released for DXP Platform.", Published=8-Jun-2000, Publisher="Altium Limited"
R58: library part Res2, "0603", LatestRevisionDate=17-Jul-2002, LatestRevisionNote="Re-released for DXP Platform.", PackageDescription="Axial Device, Thru-Hole; 2 Leads; 0.4 in Pin Spacing", PackageReference=AXIAL-0.4, Published=8-Jun-2000, Publisher="Altium Limited"
RGB1: library part TJ-L5FYTXHTCYLCRGB-A5, BOM_JLCPCB Part Class="Extended Part", BOM_Manufacturer=TOGIALED, BOM_Manufacturer Part=TJ-L5FYTXHTCYLCRGB-A5, BOM_Supplier=LCSC, BOM_Supplier Part=C330749, Contributor=LCSC, spicePre=L, spiceSymbolName=TJ-L5FYTXHTCYLCRGB-A5
U1: "LMR14020SDDAR / DC-DC电源芯片//SO PowerPAD-8", Manufacturer Name="Texas Instruments", Manufacturer Part Number=LMR14020SDDAR, PackageReference=LMR14020SDDAR
U2: library part SCT2220TVB, "LMR51420YDDC  SOT23-6"
U3: library part SSP9193-33M5R, "ME6211C33M5G-N  SOT23-5", BOM_JLCPCB Part Class="Extended Part", BOM_Manufacturer="Shanghai Siproin Microelectronics", BOM_Manufacturer Part=SSP9193-33M5R, BOM_Supplier=LCSC, BOM_Supplier Part=C411022, Contributor=LCSC, spicePre=U, spiceSymbolName=SSP9193-33M5R
U5: library part MCP2562FDT-E/MF, "MCP2562FDT-E/MF  DFN-8"
U6: library part STM32_LQFP64_6, "STM32G431CBU6  QFN48"
U7: library part THVD1450
U9 U12: "光耦 PS2801-1 SOP-4"
U10: "ULN2001D SOP-8"
Y1: library part XTLA_Sc

## Free pads (board coordinates)
  round 1.5 smd: 1(1.481,27.742)
  round 0.7 smd: 1(11.136,13.666) 1(11.681,12.713)
  oval 1.2x1 smd: 1(13.007,7.475) 1(18.706,14.763) 1(19.365,16) 1(20.635,16.963) 1(21.006,5.788)
  oval 2.5x2 smd rot 120: 1(17.581,24.388) 1(20.596,25.463)
  oval 2.5x2 smd: 1(18.363,38.415) 1(22.752,28.113) 1(23.431,31.546)
  oval 2.5x2 smd far side: 1(18.363,38.415) 1(23.387,31.763)
  oval 2.5x2 smd far side rot 120: 1(18.587,24.573)
  oval 2.5x2 smd far side rot 125: 1(21.181,26.113)
  oval 2.5x2 smd far side rot 35: 1(21.435,38.531)
  oval 2.5x2 smd rot 35: 1(21.656,38.663)
  oval 4.27x2 smd far side rot 15: 1(22.635,35.288)
  oval 2.5x2 smd far side rot 165: 1(22.831,28.913)
  oval 4.27x2 smd rot 15: 1(23.011,35.288)
  oval 2.5x2 smd rot 135: 1(30.606,50.092)
  oval 2.5x2 smd far side rot 135: 1(30.606,50.092)
  oval 2.5x2 smd rot 140: 1(32.631,52.513)
  oval 2.5x2 smd far side rot 140: 1(32.631,52.513)
  round 0.6 smd: 9(9.056,23.263) 10(9.956,23.388)
  round 0.5 smd: 11(10.721,23.803)

## Via types
v1: diameter 0.6, hole 0.3, Top Layer to Bottom Layer, tented both sides, 173 vias

## Nets (pads, with @x,y where several pads share a name; then routed paths per layer and width w, separated by ;. In a path a pad name is that pad's centre, name@x,y a point inside that pad or via, vN(x,y) a via of type N, cw(c..) or ccw(c..) an arc to the next point about the centre after c; other vN are vias at no path point)
485_A: ESD1.2 pad.1@17.581,24.388 pad.1@18.587,24.573 R29.1 U7.6 | length 8.5
  Top Layer w0.27: pad.1@17.581,24.388 17.581,23.7 22.343,18.938 U7.6@23.401,18.938
  other v1: 18.364,23.876 17.956,24.888
485_B: ESD1.1 pad.1@20.596,25.463 pad.1@21.181,26.113 R29.2 U7.7 | length 7.6
  Top Layer w0.27: R29.2@20.431,22.138 20.596,22.304 pad.1@20.596,25.463 ; R29.2@20.564,22.136 20.554,21.54 22.506,19.588 U7.7@23.401,19.588
  other v1: 21.361,25.679 20.498,26.137
A3.3V: C29.2 C30.2 L3.2 U6.20 U6.21 | length 5.5
  Top Layer w0.27: U6.21@8.806,17.563 8.666,17.563 8.282,17.947 7.808,17.947 v1(7.744,18.01) 7.798,18.063 U6.20@8.806,18.063
  Bottom Layer w0.27: C29.2@8.781,18.688 C29.2@8.831,18.638
  Bottom Layer w0.5: C30.2@6.918,18.055 7.672,18.055 7.717,18.01 v1(7.744,18.01) ; v1@7.759,18.036 7.766,18.029 7.791,18.029 7.822,18.06 7.942,18.06 8.435,18.553 8.646,18.553 C29.2@8.781,18.688 ; L3.2@8.831,17.688 C29.2@8.831,18.638
ADC2_IN3: C41.2 R53.2 R54.1 U6.14 | length 9.7
  Top Layer w0.27: v1(7.288,22.363) 7.351,22.3 7.351,22.175 8.463,21.063 U6.14@8.806,21.063
  Top Layer w0.35: R53.2@4.723,27.638 R53.2@4.802,27.559 ; R53.2@4.863,27.559 R53.2@4.802,27.559 ; v1(6.724,24.506) 6.702,24.528 6.702,25.331 6.056,25.977 R54.1@6.056,26.813 ; C41.2@6.914,26.791 6.903,26.802 6.067,26.802 R54.1@6.056,26.813 ; R53.2@4.802,27.559 5.548,26.813 R54.1@6.056,26.813
  Bottom Layer w0.27: v1(6.724,24.506) 7.296,23.933 7.296,22.371 v1(7.288,22.363)
ADC2_IN5: U6.16
ADC2_IN15: C39.2 R51.2 R52.1 U6.28 | length 7.9
  Top Layer w0.27: U6.28@10.941,15.428 10.941,15.035 10.364,14.459 10.364,12.948 12.481,10.831 R52.1@12.481,10.338 C39.2@12.481,9.488 R51.2@12.481,8.638
ADC2_IN17: pad.9 U6.12 | length 1.2
  Top Layer w0.27: pad.9@9.056,23.263 9.441,22.86 U6.12@9.441,22.198
ADC_IN1: C37.2 R31.2 R39.1 U6.8 | length 26.4
  Top Layer w0.27: U6.8@11.441,22.198 v1(11.441,23.373) ; v1(18.78,10.988) 18.716,10.925 18.716,10.585 18.705,10.574 18.705,9.539 19.63,8.614 C37.2@20.483,8.614 20.506,8.591 R39.1@20.506,7.788 R31.2@20.506,6.891
  Signal Layer 2 w0.27: v1(11.441,23.373) 12.415,23.373 13.05,22.738 14.24,22.738 15.07,23.568 16.962,23.568 19.231,21.3 19.231,11.529 18.78,11.078 v1(18.78,10.988)
ADC_IN2: U6.9
ADC_IN3: pad.11 U6.10 | length 1.7
  Top Layer w0.27: U6.10@10.441,22.198 10.441,22.82 10.721,23.101 pad.11@10.721,23.803
ADC_IN4: pad.10 U6.11 | length 1.2
  Top Layer w0.27: U6.11@9.941,22.198 pad.10@9.956,23.388
AIN_1: pad.1@21.006,5.788 R31.1 | length 1.4
  Top Layer w0.27: pad.1@21.006,5.788 21.606,6.388 R31.1@21.606,6.891
AIN_2: pad.1@13.007,7.475 R51.1 | length 1.4
  Top Layer w0.5: pad.1@13.007,7.475 13.581,8.049 R51.1@13.581,8.638
AIN_3: pad.1@1.481,27.742 R53.1 | length 2.2
  Top Layer w0.4: pad.1@1.481,27.742 1.584,27.638 R53.1@3.623,27.638
BLUE: R57.2 U6.34 | length 36.8
  Top Layer w0.254: v1(13.007,12.2) 13.749,12.942 13.749,14.578 13.941,14.77 U6.34@13.941,15.428 ; v1(39.257,6.713) 39.351,6.713 39.564,6.5 R57.2@40.552,6.5
  Signal Layer 2 w0.254: v1(13.007,12.2) 14.349,12.2 17.823,8.726 22.119,8.726 26.082,12.688 32.528,12.688 38.503,6.713 v1(39.257,6.713)
CANH: pad.1@32.631,52.513 R27.2 U5.7 | length 40.5
  Signal Layer 2 w0.254: v1(10.049,36.027) 10.049,36.064 10.956,36.97 10.956,42.275 18.489,49.809 30.997,49.809 31.981,50.792 v1(31.981,51.663)
  Bottom Layer w0.254: U5.7@4.631,32.563 4.631,33.528 6.14,35.038 9.06,35.038 v1(10.049,36.027)
  Bottom Layer w0.7: v1(31.981,51.663) pad.1@32.631,52.513
CANL: pad.1@30.606,50.092 R27.1 U5.6 | length 37.7
  Signal Layer 2 w0.254: v1(9.181,36.045) 10.381,37.245 10.381,42.664 18.153,50.436 v1(30.506,50.436)
  Bottom Layer w0.254: U5.6@3.981,32.563 3.981,33.52 5.952,35.492 8.627,35.492 v1(9.181,36.045)
CLOCK: R1.1 U6.5 | length 3.3
  Top Layer w0.27: U6.5@12.941,22.198 12.941,23.235 14.102,24.396 14.102,24.924 R1.1@14.063,24.963
D3.3V: C23.2 C25.2 C26.2 C27.2 C28.2 C31.2 C35.2 C38.2 D9.1 F7.2 L3.1 R33.2 R42.2 R58.2 R98.2 U6.1 U6.23 U6.35 U6.48 U7.8 Y1.4 | length 47.6
  Top Layer w0.27: v1(6.914,17.196) 6.977,17.133 6.977,16.603 6.972,16.597 7.081,16.488 7.156,16.563 U6.23@8.806,16.563 ; C25.2@14.441,14.238 U6.35@14.441,15.428 ; U6.1@14.941,22.198 15.421,22.198 ; v1(15.556,22.638) 15.556,22.333 15.421,22.198 ; U6.48@15.576,21.563 15.576,22.043 15.421,22.198 ; v1(16.114,22.198) 15.421,22.198
  Top Layer w0.5: v1(7.956,15.238) v1(7.956,15.888) ; F7.2@8.367,31.252 10.166,29.453 10.166,28.913 10.17,28.909 C23.2@10.231,28.909 ; C23.2@10.241,28.909 10.241,28.848 10.217,28.824 10.217,27.674 Y1.4@10.477,27.413 ; v1(19.34,10.311) 19.367,10.311 19.599,10.078 20.377,10.078 20.381,10.074 R33.2@20.381,10.013 ; U7.8@23.401,20.238 24.806,20.238 C38.2@24.831,20.213 25.031,20.413 v1(25.686,20.413) v1(25.686,19.738)
  Top Layer w0.6: C25.2@14.381,14.238 14.848,14.238 v1(15.421,13.666)
  Signal Layer 2 w0.5: v1(1.006,30.813) 1.031,30.813 v1(1.481,30.363) 1.481,27.742
  Bottom Layer w0.27: 15.531,22.013 15.026,22.013 14.841,22.198 15.556,22.198 ; 15.531,22.013 15.556,22.038 15.556,22.198 ; 15.531,22.013 15.929,22.013 v1(16.114,22.198) 15.996,22.198 15.556,22.198
  Bottom Layer w0.5: v1(1.481,30.363) 0.981,30.863 C35.2@0.981,31.544 1.977,31.544 R98.2@1.983,31.538 ; v1(7.637,29.886) 7.656,29.867 7.656,28.051 D9.1@7.72,27.986 ; L3.1@8.831,16.588 C31.2@8.831,15.751 ; C31.2@8.918,15.663 C31.2@8.831,15.751 ; C27.2@13.941,22.338 15.556,22.338 15.706,22.338 15.781,22.413 ; v1(24.447,9.25) R42.2@25.177,9.25 29.032,9.25 30.041,8.241 30.041,7.592 31.77,5.863 R58.2@34.562,5.863 ; v1(25.686,19.738) v1(25.686,20.413) ; v1(7.956,15.238) C31.2@8.606,15.888 ; v1(7.956,15.238) 8.318,15.238 C31.2@8.831,15.751 ; v1(7.956,15.238) v1(7.956,15.888) C31.2@8.606,15.888 ; C31.2@8.606,15.888 8.693,15.888 C31.2@8.831,15.751
  Bottom Layer w0.6: 15.556,22.198 15.556,22.338 v1(15.556,22.638) 15.781,22.413 v1@15.996,22.198
  other v1: 8.349,29.886 7.637,30.581 8.349,30.581
D5V: C8.1 C9.1 C10.1 C19.1 C32.1 L2.2 R6.2 R21.1 U3.1 U5.3 | length 32.4
  Top Layer w0.5: C32.1@3.306,28.563 v1(4.031,28.563) ; R6.2@7.213,43.563 7.213,43.609 7.217,43.613 9.37,43.613 9.421,43.563 11.906,43.563 L2.2@11.931,43.588
  Top Layer w0.6: U3.1@7.017,36.617 R21.1@7.017,37.733 ; C19.1@8.318,38.103 8.367,38.055 v1(8.367,37.063) v1(8.367,36.363)
  Top Layer w1: R21.1@7.17,38.103 C19.1@8.318,38.103 8.931,37.49 11.842,37.49 12.428,38.076 12.428,39.368 C10.1@12.498,39.438 ; L2.2@11.931,43.588 L2.2@12.548,43.588 ; L2.2@12.806,43.588 L2.2@12.548,43.588 ; C8.1@13.731,39.368 12.568,39.368 C10.1@12.498,39.438 ; C10.1@12.498,39.438 C9.1@12.498,41.517 12.498,43.538 L2.2@12.548,43.588
  Signal Layer 2 w0.6: v1(4.031,28.563) 4.031,29.288 5.359,30.616 5.359,33.072 8.367,36.08 v1(8.367,36.363)
  Bottom Layer w0.35: U5.3@3.981,29.463 3.981,28.613 v1(4.031,28.563)
D12V: 12VH.1 C7.1 C12.1 C13.1 C14.1 C15.1 C16.1 C17.1 C48.1 D7.1 L1.2 R4.1 R9.1 U2.3 | length 53.6
  Top Layer w0.5: v1(29.456,53.938) 29.4,53.993 R9.1@29.4,54.763 C12.1@30.281,54.763
  Top Layer w0.8: 12VH.1@9.531,50.363 12VH.1@9.631,50.263 ; 11.531,50.263 C13.1@11.006,50.263 ; 28.548,53.03 v1(28.931,53.413) v1(29.456,53.938) C12.1@30.131,54.613 ; 12VH.1@9.631,50.263 10.456,50.263 ; 12VH.1@9.631,50.263 10.031,49.863 U2.3@10.031,48.688 ; U2.3@10.031,48.688 10.045,48.674 C7.1@11.256,48.674 11.256,50.013 C13.1@11.006,50.263 ; U2.3@10.031,48.688 10.543,49.201 ; 10.456,50.263 C13.1@11.006,50.263 ; 10.456,50.263 10.543,50.176 10.543,49.201 ; 10.543,49.201 11.006,49.663 C13.1@11.006,50.263
  Signal Layer 2 w0.6: v1(13.688,50.609) v1(14.388,50.609) ; v1@14.365,49.884 v1@14.383,50.446 ; v1@14.423,50.456 v1(15.088,50.609)
  Signal Layer 2 w0.8: 14.017,49.884 14.365,49.884 14.888,49.884 15.35,50.347 ; v1(15.088,50.609) 16.49,52.011 27.528,52.011 v1(28.931,53.413) v1@29.343,53.826
  Bottom Layer w0.6: R4.1@8.181,49.763 8.931,49.763
  Bottom Layer w0.8: 8.931,49.763 12VH.1@9.531,50.363 ; 16.9,50.563 16.956,50.619 ; 29.226,54.168 v1(29.456,53.938)
  Bottom Layer w1: v1@13.663,49.784 v1(15.088,49.784) 16.922,49.784 C17.1@16.956,49.817 ; v1(13.663,49.809) 13.663,50.584 v1(13.688,50.609) v1(14.388,50.609) v1(15.088,50.609) ; v1@15.098,50.619 15.789,50.619 v1(15.799,50.609) 15.809,50.619 16.956,50.619 ; C14.1@16.909,51.468 16.956,51.421 16.956,50.619 ; C16.1@19.068,51.468 19.068,50.613 ; D7.1@20.813,49.817 C15.1@19.068,49.817 ; C17.1@16.956,49.817 16.956,50.619 ; C17.1@16.956,49.817 C15.1@19.068,49.817 ; 16.956,50.619 19.062,50.619 19.068,50.613 ; C15.1@19.068,49.817 19.068,50.613
  Bottom Layer w1.15: C14.1@16.909,51.468 C16.1@19.068,51.468
  other v1: 15.799,49.796 14.363,49.809 29.656,53.093
D24V: C11.1 D2.2 U1.2 | length 12
  Top Layer w0.6: D2.2@23.64,48.547 23.64,49.055 23.894,49.309 ; D2.2@23.894,48.166 D2.2@23.894,48.674 ; D2.2@24.402,47.785 24.783,47.785 25.037,48.039 25.037,48.267 ; U1.2@25.037,51.747 25.037,50.452 ; D2.2@23.894,48.674 23.894,49.309 ; D2.2@23.894,48.674 25.037,49.817 ; 23.894,49.309 25.037,50.452 ; D2.2@24.93,48.313 24.991,48.313 25.037,48.267 ; D2.2@24.93,48.313 D2.2@24.148,48.313 25.037,49.202 ; D2.2@24.93,48.313 25.037,48.42 ; 25.037,48.267 25.037,48.42 ; 25.037,48.42 25.037,49.202 ; 25.037,49.202 25.037,49.817 ; 25.037,49.817 25.037,50.452
  other v1: 23.756,46.913 24.481,46.913 23.109,47.741 23.056,48.488